# Altium PCB Arm_V1.PcbDoc
Units mil, origin at the board's own origin, x right, y up, seen from the top; angles counter-clockwise.
Board outline 2870 x 2610 mil, 4 copper layers (Top Layer, Ground, Power, Bottom Layer), stack 58.661 mil thick; 196 components, 122 nets, 577 pads, 0 vias.
Unrouted connection lines stored in the file: 396.
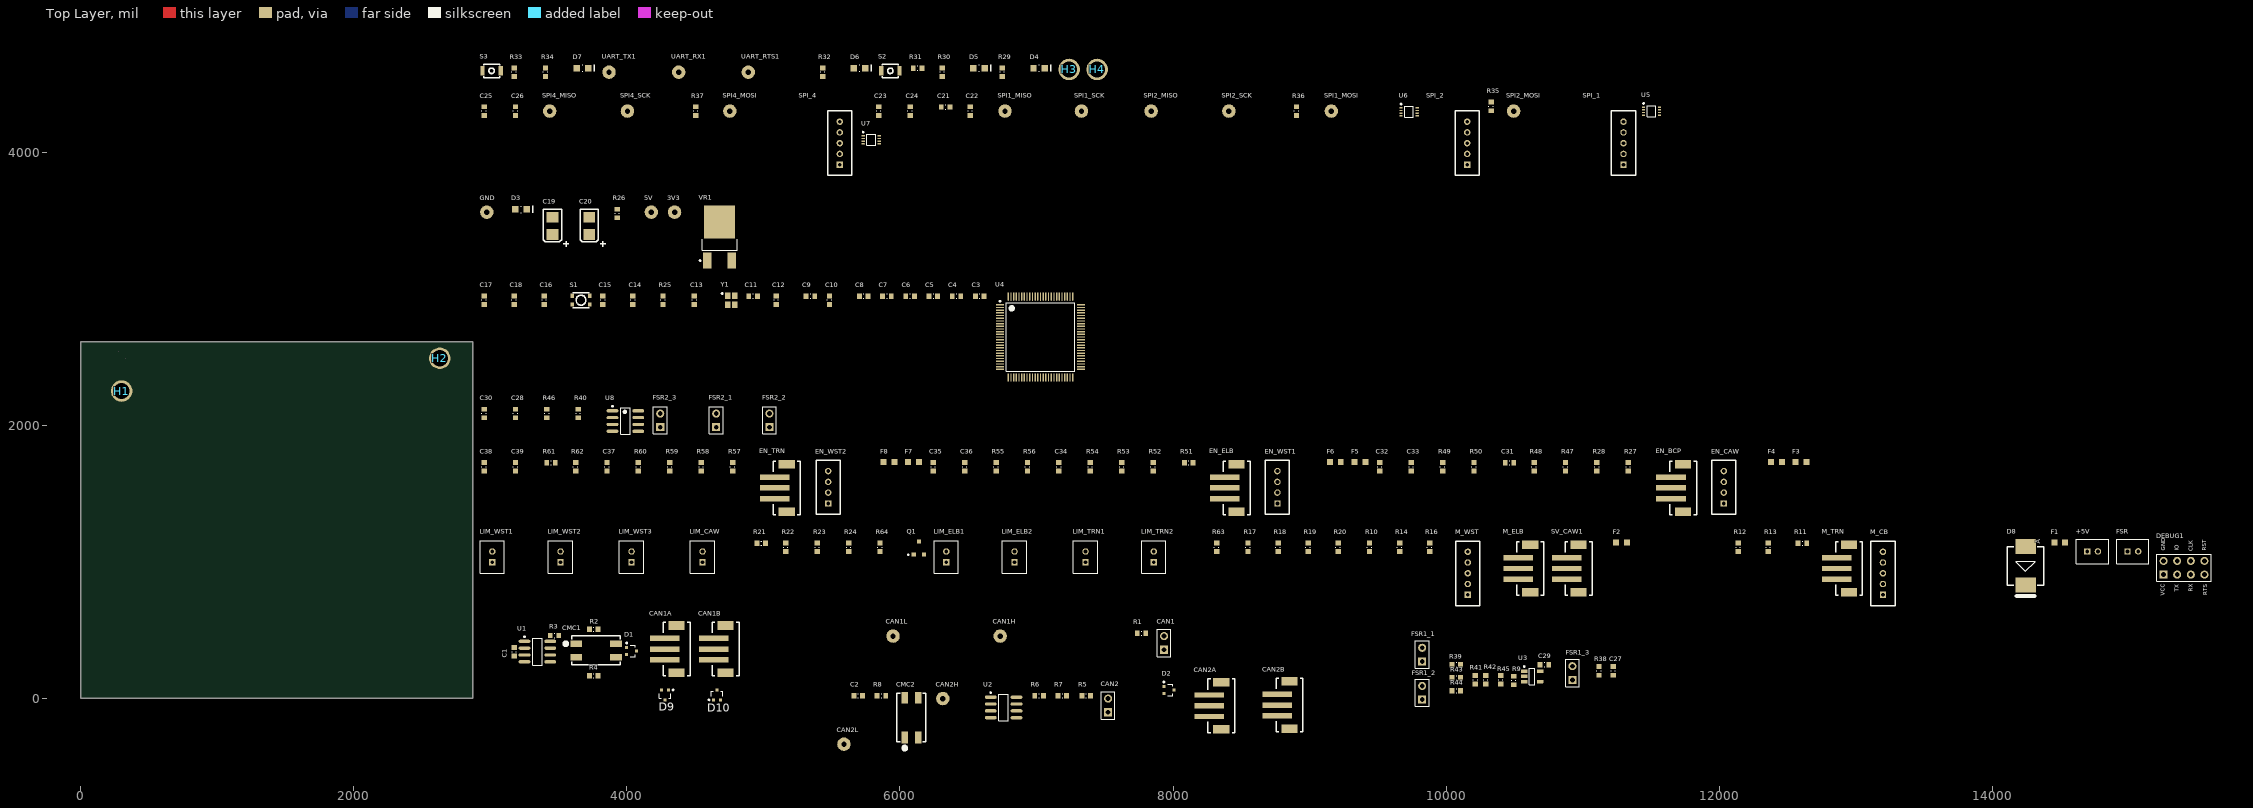
[diagram p0: Top Layer view]
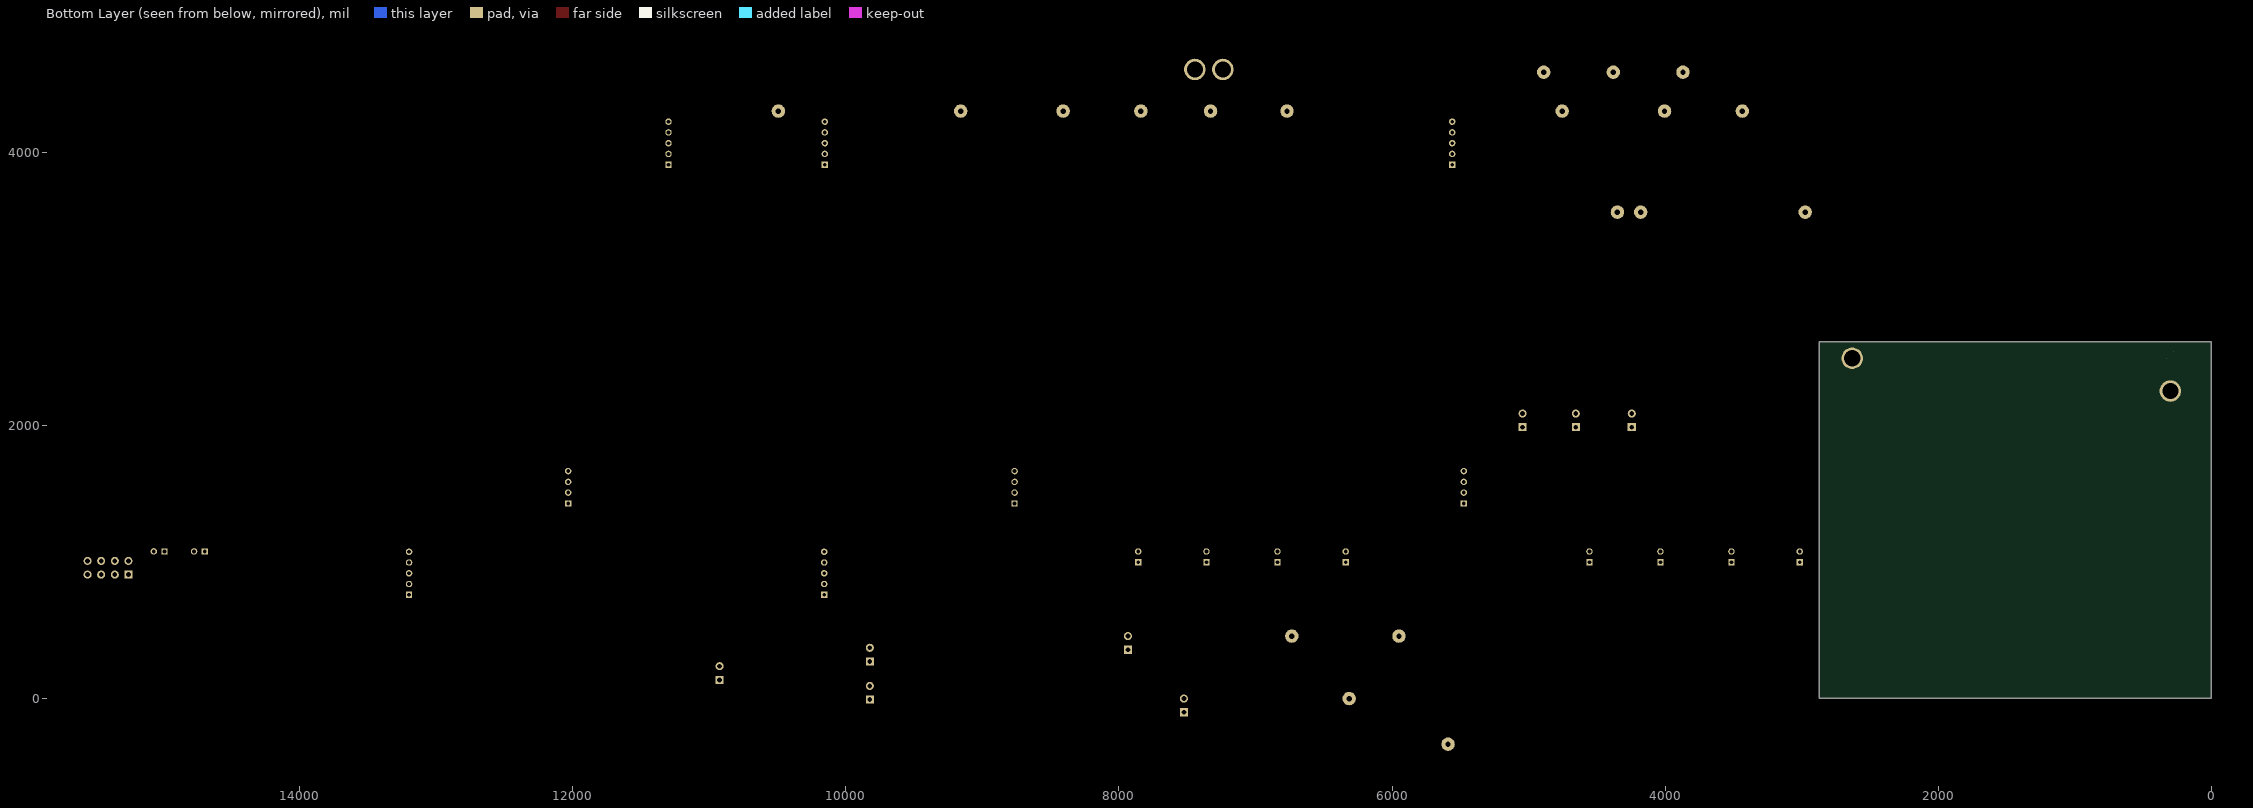
[diagram p1: Bottom Layer view, seen from below]
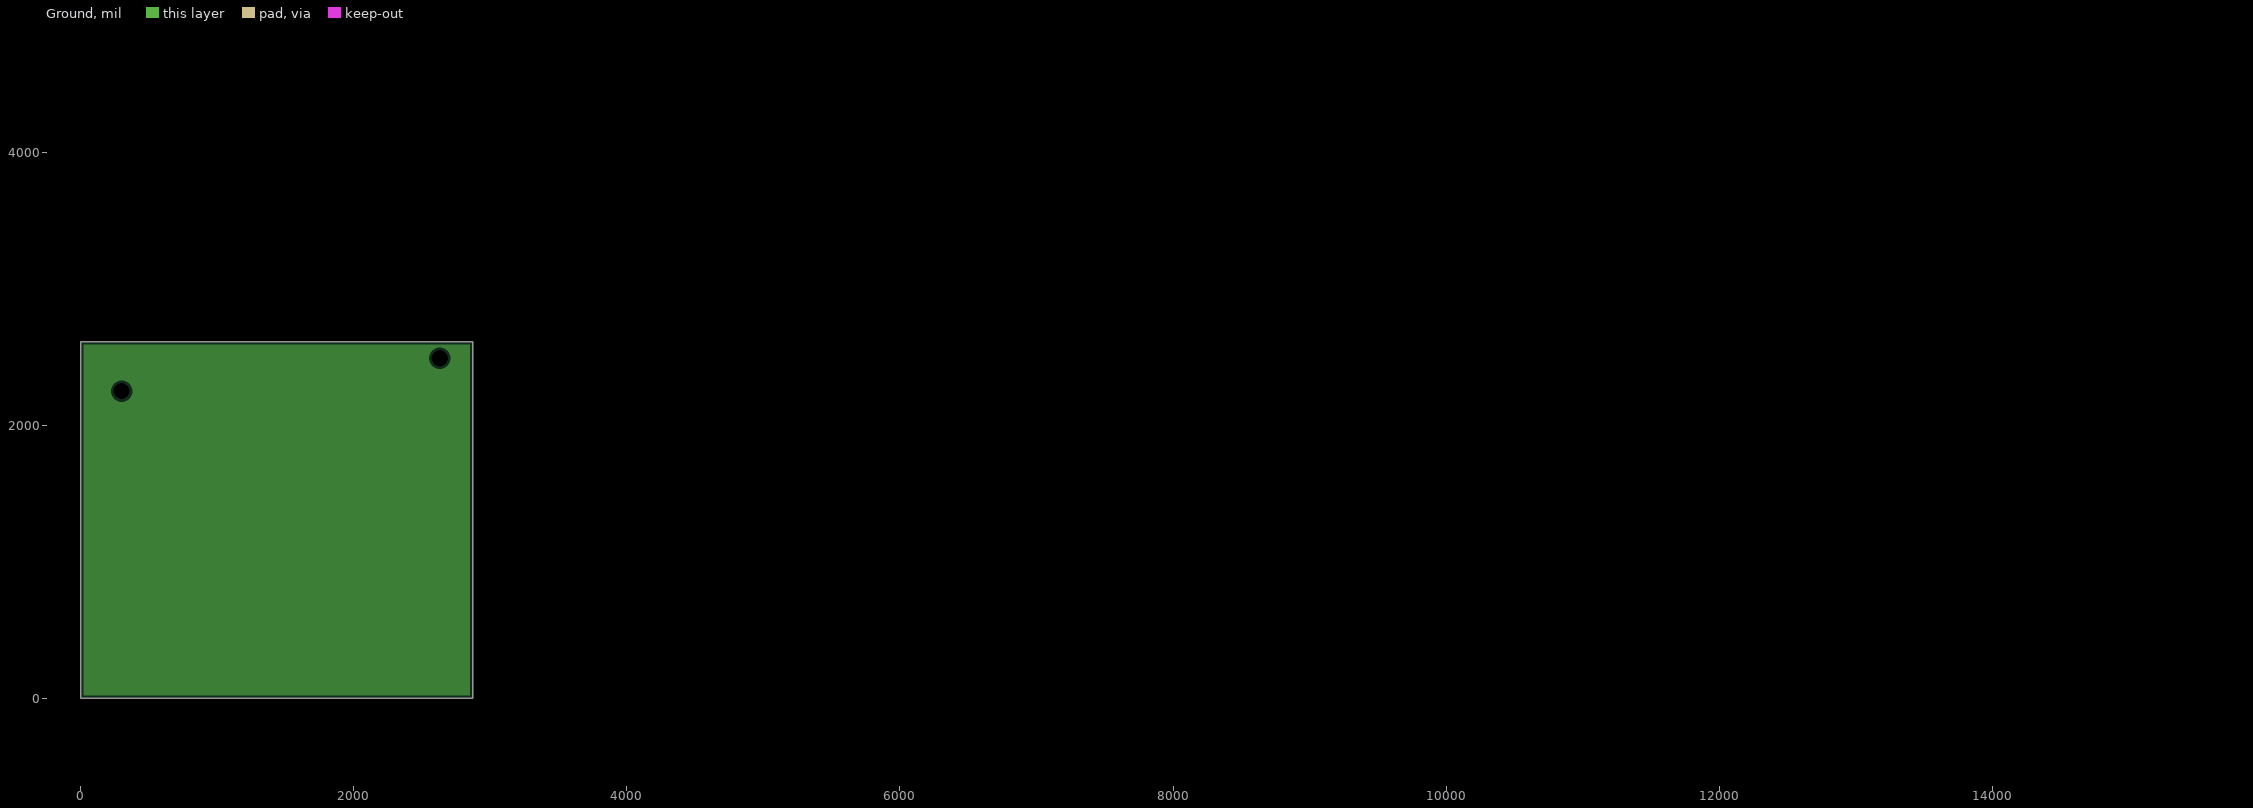
[diagram p2: Ground, clearances drawn from the general rule]
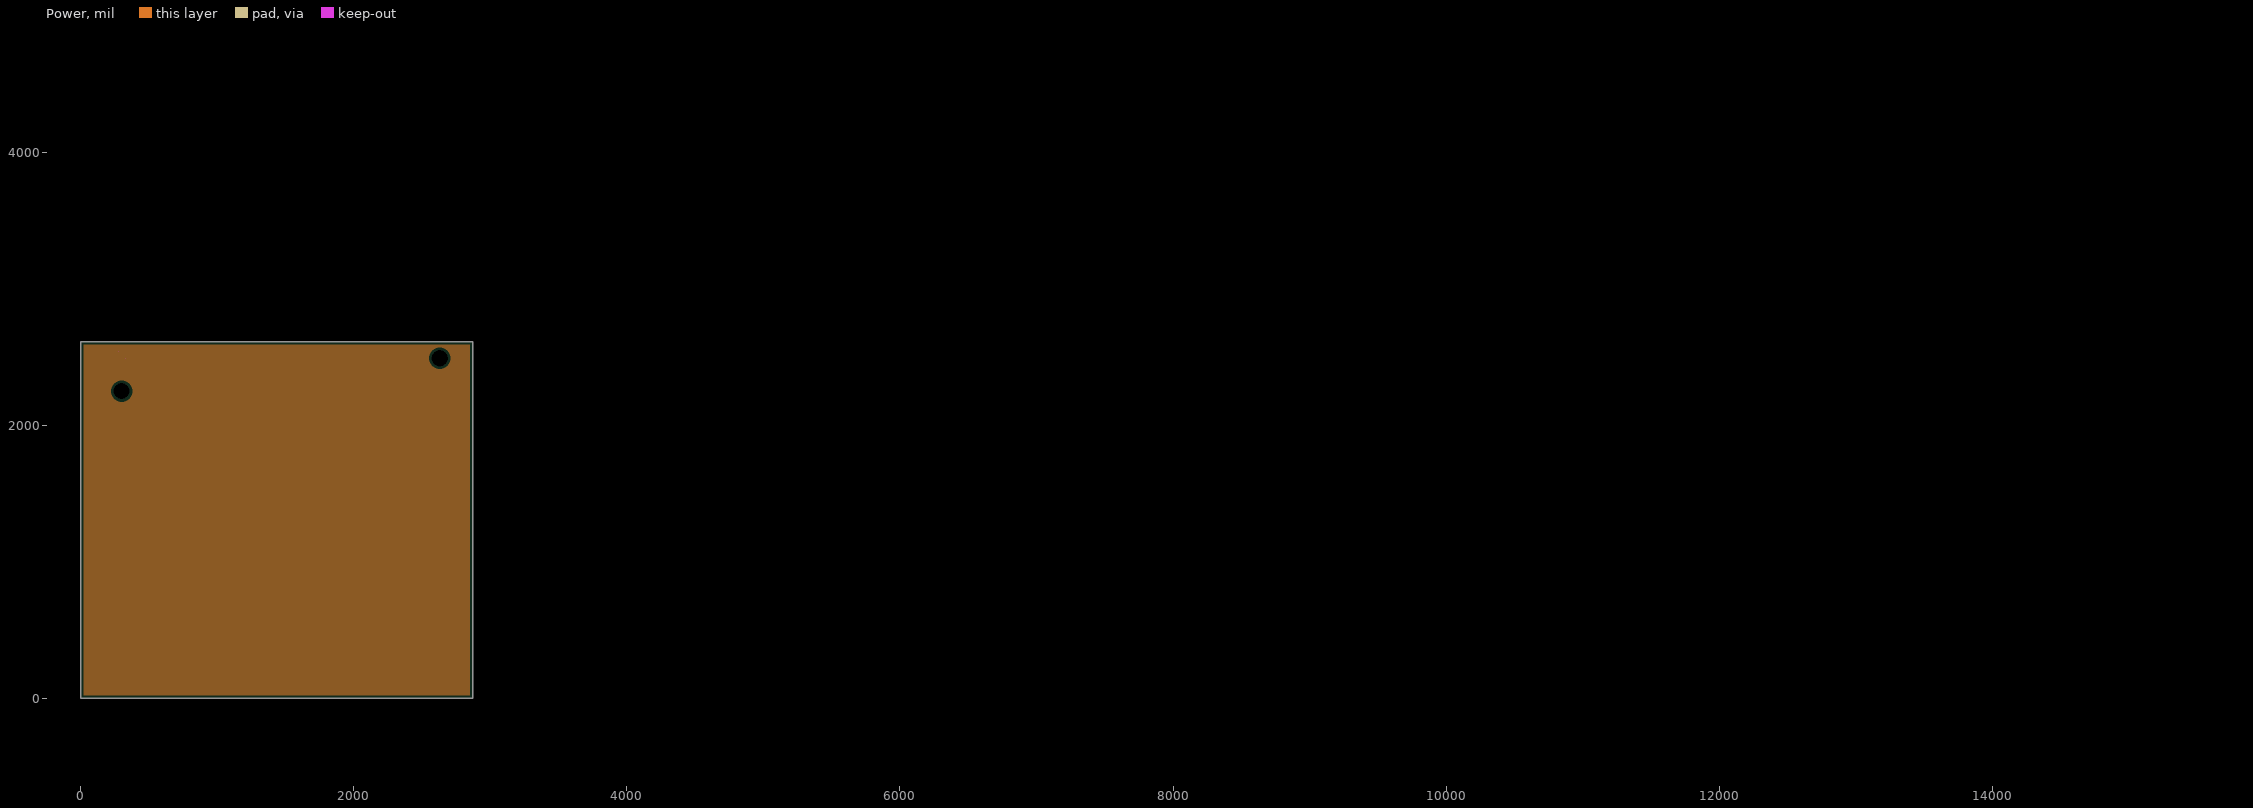
[diagram p3: Power, clearances drawn from the general rule]

## Layer stack, top to bottom
Top Solder: solder mask 0.8, Solder Resist, Dk 3.5
Top Layer: signal copper 1.3778
Dielectric 2: prepreg 4.3307, PP-006, Dk 4.1
Ground: plane copper 1.3778
Dielectric 1: dielectric 44.4882, FR-4, Dk 4.8
Power: plane copper 1.3778
Dielectric 3: prepreg 4.3307, PP-006, Dk 4.1
Bottom Layer: signal copper 1.3778
Bottom Solder: solder mask 0.8, Solder Resist, Dk 3.5

## Board outline
0,0 2870,0 2870,2610 0,2610
cut-out: 330,2485
cut-out: 275,2540

## Design rules (kind name [scope] priority, off if disabled: settings)
BoardOutlineClearance [All] p1: gap=10 ignorepadtopadclearanceinfootprint=FALSE except(0: Arc-SplitContinuation Track-SplitContinuation SMDPad-SplitContinuation THPad-SplitContinuation Via-SplitContinuation Fill-SplitContinuation Poly-SplitContinuation Region-SplitContinuation Text-SplitContinuation)
Clearance [All] p1: gap=10 ignorepadtopadclearanceinfootprint=TRUE except(0: Arc-Hole Track-Hole SMDPad-Hole THPad-Hole Via-Hole Fill-Hole Poly-Hole Region-Hole Text-Hole; 6: Arc-Arc Arc-Track Arc-SMDPad Track-Track Track-SMDPad SMDPad-SMDPad)
DiffPairsRouting [All] p1: maxlimit=10 minlimit=10 mostfreqgap=10 toplayer_minwidth=15 toplayer_maxwidth=15 toplayer_prefwidth=15 bottomlayer_minwidth=15 bottomlayer_maxwidth=15 bottomlayer_prefwidth=15 maxuncoupledlength=500
HoleSize [All] p1: absolutevalues=TRUE maxlimit=244.09 minlimit=7.87 maxpercent=80.000 minpercent=20.000
MinimumAnnularRing [All] p1: minimumring=5.91
PlaneClearance [All] p1: clearance=20
PlaneConnect [All] p1: planeconnectstyle=Relief reliefexpansion=20 reliefentries=4 reliefconductorwidth=10 reliefairgap=10
PolygonConnect [All] p1: connectstyle=Direct reliefconductorwidth=10 reliefentries=4 polygonreliefangle="90 Angle" airgapwidth=10
RoutingVias [All] p1: holewidth=16 width=28 viastyle="Through Hole" minholewidth=16 minwidth=28 maxholewidth=28 maxwidth=50
SolderMaskExpansion [All] p1: expansion=4
Width thicc [(InNet('-5V') OR InNet('+3V3') OR InNet('+5V'))] p1: maxlimit=20 minlimit=10 preferedwidth=15 minimp=50.000000 maximp=50.000000 favimp=50.000000
Width [All] p2: maxlimit=20 minlimit=4 preferedwidth=10 bottomlayer_minwidth=6 minimp=50.000000 maximp=50.000000 favimp=50.000000
26 further rules are at their usual default settings.

## Classes and differential pairs
component class "SPI Encoders": C21 C22 C23 C24 C25 C26 R35 R36 R37 SPI1_MISO SPI1_MOSI SPI1_SCK SPI2_MISO SPI2_MOSI SPI2_SCK SPI4_MISO SPI4_MOSI SPI4_SCK SPI_1 SPI_2 SPI_4 U5 U6 U7
component class Encoders: C31 C32 C33 C34 C35 C36 C37 C38 C39 EN_BCP EN_CAW EN_ELB EN_TRN EN_WST1 EN_WST2 F3 F4 F5 F6 F7 F8 R27 R28 R47 R48 R49 R50 R51 R52 R53 R54 R55 R56 R57 R58 R59 R60 R61 R62
component class Connectors: +5V CAN1A CAN1B CAN2A CAN2B D1 D2 D8 D9 D10 DEBUG1 F1 F2 FSR LIM_CAW LIM_ELB1 LIM_ELB2 LIM_TRN1 LIM_TRN2 LIM_WST1 LIM_WST2 LIM_WST3 M_CB M_ELB M_TRN M_WST Q1 R10 R11 R12 R13 R14 R16 R17 R18 R19 R20 R21 R22 R23 R24 R63 R64 SV_CAW1
component class FSR: C27 C28 C29 C30 FSR1_1 FSR1_2 FSR1_3 FSR2_1 FSR2_2 FSR2_3 R9 R38 R39 R40 R41 R42 R43 R44 R45 R46 U3 U8
component class Support: D4 D5 D6 D7 H1 H2 H3 H4 R29 R30 R31 R32 R33 R34 S2 S3 UART_RTS UART_RTS1 UART_RX UART_RX1 UART_TX UART_TX1
component class Power: 3V3 5V C19 C20 D3 GND R26 VR1
component class MCU: C3 C4 C5 C6 C7 C8 C9 C10 C11 C12 C13 C14 C15 C16 C17 C18 R25 S1 U4 Y1
component class CAN: C1 C2 CAN1 CAN1H CAN1L CAN2 CAN2H CAN2L CMC1 CMC2 R1 R2 R3 R4 R5 R6 R7 R8 U1 U2
differential pair CAN2: +CAN2_P -CAN2_N
differential pair CAN1: +CAN1_P -CAN1_N

## Components (designator, comment, footprint, x,y, rotation, side; value= is the part's Value field where it differs from the comment)
3V3 "TESTPOINT_LOOP" TESTPOINT_LOOP 4349.5,3560.5 r0 top
5V "TESTPOINT_LOOP" TESTPOINT_LOOP 4179.5,3560.5 r0 top
+5V "CON_2M" JST-B2B-PHSK 14734.5,1075.5 r0 top
C1 "CAP_0.1uF_50V_0603" CAPC0603(1608)55_N 3175,340 r270 top value=0.1uF
C2 "CAP_0.1uF_50V_0603" CAPC0603(1608)55_N 5694.5,17.78 r0 top value=0.1uF
C3 "CAP_4.7uF_0603" CAPC0603(1608)55_N 6584.5,2945.5 r0 top value=4.7uF
C4 "CAP_0.1uF_16V_0603" CAPC0603(1608)55_N 6414.5,2945.5 r0 top value=0.1uF
C5 "CAP_0.1uF_16V_0603" CAPC0603(1608)55_N 6244.5,2945.5 r0 top value=0.1uF
C6 "CAP_0.1uF_16V_0603" CAPC0603(1608)55_N 6074.5,2945.5 r0 top value=0.1uF
C7 "CAP_0.1uF_16V_0603" CAPC0603(1608)55_N 5904.5,2945.5 r0 top value=0.1uF
C8 "CAP_0.1uF_16V_0603" CAPC0603(1608)55_N 5734.5,2945.5 r0 top value=0.1uF
C9 "CAP_1uF_16V_0603" CAPC0603(1608)55_N 5344.5,2945.5 r0 top value=1uF
C10 "CAP_1uF_16V_0603" CAPC0603(1608)55_N 5484.5,2915.5 r90 top value=1uF
C11 "CAP_0.1uF_50V_0603" CAPC0603(1608)55_N 4924.5,2945.5 r0 top value=0.1uF
C12 "CAP_10nF_0603" CAPC0603(1608)55_N 5094.5,2915.5 r90 top value=10nF
C13 "CAP_0.1uF_16V_0603" CAPC0603(1608)55_N 4494.5,2915.5 r90 top value=0.1uF
C14 "CAP_15pF_0603" CAPC0603(1608)55_N 4044.5,2915.5 r90 top value=15pF
C15 "CAP_15pF_0603" CAPC0603(1608)55_N 3824.5,2915.5 r90 top value=15pF
C16 "CAP_0.1uF_16V_0603" CAPC0603(1608)55_N 3394.5,2915.5 r90 top value=0.1uF
C17 "CAP_4.7uF_0603" CAPC0603(1608)55_N 2954.5,2915.5 r90 top value=4.7uF
C18 "CAP_4.7uF_0603" CAPC0603(1608)55_N 3174.5,2915.5 r90 top value=4.7uF
C19 "CAP_10uF_1411_POL" AVX-CAPC3528_V 3454.5,3460.5 r90 top value=10uF
C20 "CAP_10uF_1411_POL" AVX-CAPC3528_V 3724.5,3460.5 r90 top value=10uF
C21 "CAP_0.1uF_16V_0603" CAPC0603(1608)55_N 6334.5,4330.5 r0 top value=0.1uF
C22 "CAP_0.1uF_16V_0603" CAPC0603(1608)55_N 6514.5,4300.5 r90 top value=0.1uF
C23 "CAP_0.1uF_16V_0603" CAPC0603(1608)55_N 5844.5,4300.5 r90 top value=0.1uF
C24 "CAP_0.1uF_16V_0603" CAPC0603(1608)55_N 6074.5,4300.5 r90 top value=0.1uF
C25 "CAP_0.1uF_16V_0603" CAPC0603(1608)55_N 2954.5,4300.5 r90 top value=0.1uF
C26 "CAP_0.1uF_16V_0603" CAPC0603(1608)55_N 3184.5,4300.5 r90 top value=0.1uF
C27 "CAP_DNP_0603" CAPC0603(1608)55_N 11225,200 r90 top value=DNP
C28 "CAP_DNP_0603" CAPC0603(1608)55_N 3184.5,2085.5 r90 top value=DNP
C29 "CAP_0.1uF_16V_0603" CAPC0603(1608)55_N 10720,246.5 r0 top value=0.1uF
C30 "CAP_0.1uF_16V_0603" CAPC0603(1608)55_N 2954.5,2085.5 r90 top value=0.1uF
C31 "CAP_0.1uF_16V_0603" CAPC0603(1608)55_N 10464.5,1725.5 r0 top value=0.1uF
C32 "CAP_0.1uF_16V_0603" CAPC0603(1608)55_N 9514.5,1695.5 r90 top value=0.1uF
C33 "CAP_0.1uF_16V_0603" CAPC0603(1608)55_N 9744.5,1695.5 r90 top value=0.1uF
C34 "CAP_0.1uF_16V_0603" CAPC0603(1608)55_N 7164.5,1695.5 r90 top value=0.1uF
C35 "CAP_0.1uF_16V_0603" CAPC0603(1608)55_N 6244.5,1695.5 r90 top value=0.1uF
C36 "CAP_0.1uF_16V_0603" CAPC0603(1608)55_N 6474.5,1695.5 r90 top value=0.1uF
C37 "CAP_0.1uF_16V_0603" CAPC0603(1608)55_N 3854.5,1695.5 r90 top value=0.1uF
C38 "CAP_0.1uF_16V_0603" CAPC0603(1608)55_N 2954.5,1695.5 r90 top value=0.1uF
C39 "CAP_0.1uF_16V_0603" CAPC0603(1608)55_N 3184.5,1695.5 r90 top value=0.1uF
CAN1 "CAN1JMP" HDR1X2 7934.5,355.5 r90 top
CAN1A "CON_3M" JST-B3B-SM4-TB 4463.43,360 r90 top
CAN1B "CON_3M" JST-B3B-SM4-TB 4822.01,360 r90 top
CAN1H "TESTPOINT_LOOP" TESTPOINT_LOOP 6734.5,455.5 r90 top
CAN1L "TESTPOINT_LOOP" TESTPOINT_LOOP 5949.5,455.5 r90 top
CAN2 "CAN2JMP" HDR1X2 7524.5,-102.22 r90 top
CAN2A "CON_3M" JST-B3B-SM4-TB 8452.01,-55 r90 top
CAN2B "CON_3M" JST-B3B-SM4-TB 8952.01,-50 r90 top
CAN2H "TESTPOINT_LOOP" TESTPOINT_LOOP 6314.5,-2.22 r90 top
CAN2L "TESTPOINT_LOOP" TESTPOINT_LOOP 5590,-336.29 r90 top
CMC1 "CMC" DR331-513AE 3775,350 r0 top
CMC2 "CMC" DR331-513AE 6084.5,-142.22 r90 top
D1 "TVS_DIODE_CAN" NXP-SOT323-3 4034.5,346.26 r0 top
D2 "TVS_DIODE_CAN" NXP-SOT323-3 7970,60 r0 top
D3 "DIO_LED_G" LED_0805_LINE 3224.5,3580.5 r0 top
D4 "DIO_LED_Y" LED_0805_LINE 7019.5,4615.5 r0 top
D5 "DIO_LED_G" LED_0805_LINE 6579.5,4615.5 r0 top
D6 "DIO_LED_G" LED_0805_LINE 5704.5,4615.5 r0 top
D7 "DIO_LED_G" LED_0805_LINE 3674.5,4615.5 r0 top
D8 "SS32" SS32 14244.5,970.5 r90 top
D9 "TVS_DIODE_CAN" NXP-SOT323-3 4280,25 r270 top
D10 "TVS_DIODE_CAN" NXP-SOT323-3 4660,25 r90 top
DEBUG1 "HEADER 4X2" HEADER_2X4 15254.5,905.5 r0 top
EN_BCP "CON_3M" JST-B3B-SM4-TB 11834.5,1540.5 r90 top
EN_CAW "CON_4M" JST-B4B-PHSK 12034.5,1545.5 r90 top
EN_ELB "CON_3M" JST-B3B-SM4-TB 8564.5,1540.5 r90 top
EN_TRN "CON_3M" JST-B3B-SM4-TB 5269.5,1540.5 r90 top
EN_WST1 "CON_4M" JST-B4B-PHSK 8764.5,1545.5 r90 top
EN_WST2 "CON_4M" JST-B4B-PHSK 5474.5,1545.5 r90 top
F1 "FUSE_2A_0603" FUSE_0603 14494.5,1140.5 r0 top
F2 "FUSE_1.5A_0603" FUSE_0603 11284.5,1140.5 r0 top
F3 "FUSE_250mA_0603" FUSE_0603 12599.5,1730.5 r0 top
F4 "FUSE_250mA_0603" FUSE_0603 12419.5,1730.5 r0 top
F5 "FUSE_250mA_0603" FUSE_0603 9369.5,1730.5 r0 top
F6 "FUSE_250mA_0603" FUSE_0603 9189.5,1730.5 r0 top
F7 "FUSE_250mA_0603" FUSE_0603 6099.5,1730.5 r0 top
F8 "FUSE_250mA_0603" FUSE_0603 5919.5,1730.5 r0 top
FSR "CON_2M" JST-B2B-PHSK 15029.5,1075.5 r0 top
FSR1_1 "FSR Header" HDR1X2 9825,270 r90 top
FSR1_2 "FSR Jumper" HDR1X2 9825,-10 r90 top
FSR1_3 "FSR Header" HDR1X2 10925,135 r90 top
FSR2_1 "FSR Header" HDR1X2 4654.5,1985.5 r90 top
FSR2_2 "FSR Header" HDR1X2 5044.5,1985.5 r90 top
FSR2_3 "FSR Header" HDR1X2 4244.5,1985.5 r90 top
GND "TESTPOINT_LOOP" TESTPOINT_LOOP 2974.5,3560.5 r0 top
H1 "MOUNTING_HOLES" MOUNTING_HOLE 300,2250 r0 top
H2 "MOUNTING_HOLES" MOUNTING_HOLE 2630,2490 r0 top
H3 "MOUNTING_HOLES" MOUNTING_HOLE 7239.5,4605.5 r0 top
H4 "MOUNTING_HOLES" MOUNTING_HOLE 7444.5,4605.5 r0 top
LIM_CAW "CON_2M" JST-B2B-PHSK 4554.5,1035.5 r90 top
LIM_ELB1 "CON_2M" JST-B2B-PHSK 6339.5,1035.5 r90 top
LIM_ELB2 "CON_2M" JST-B2B-PHSK 6839.5,1035.5 r90 top
LIM_TRN1 "CON_2M" JST-B2B-PHSK 7359.5,1035.5 r90 top
LIM_TRN2 "CON_2M" JST-B2B-PHSK 7859.5,1035.5 r90 top
LIM_WST1 "CON_2M" JST-B2B-PHSK 3014.5,1035.5 r90 top
LIM_WST2 "CON_2M" JST-B2B-PHSK 3514.5,1035.5 r90 top
LIM_WST3 "CON_2M" JST-B2B-PHSK 4034.5,1035.5 r90 top
M_CB "CON_5M" JST-B5B-PHSK 13199.5,915.5 r90 top
M_ELB "CON_3M" JST-B3B-SM4-TB 10714.5,950.5 r90 top
M_TRN "CON_3M" JST-B3B-SM4-TB 13049.5,950.5 r90 top
M_WST "CON_5M" JST-B5B-PHSK 10159.5,915.5 r90 top
Q1 "NMOS_20V_6A" NMOS_SOT23-3 6139.5,1100.5 r0 top
R1 "RES_120R_0603" RESC0603(1608)_N 7769.5,475.5 r0 top value=120R
R2 "RES_0R_0603" RESC0603(1608)_N 3757.15,505 r0 top value=0R
R3 "RES_0R_0603" RESC0603(1608)_N 3470,460 r0 top value=0R
R4 "RES_0R_0603" RESC0603(1608)_N 3757.15,165 r0 top value=0R
R5 "RES_120R_0603" RESC0603(1608)_N 7364.5,17.78 r0 top value=120R
R6 "RES_0R_0603" RESC0603(1608)_N 7019.5,17.78 r0 top value=0R
R7 "RES_0R_0603" RESC0603(1608)_N 7189.5,17.78 r0 top value=0R
R8 "RES_0R_0603" RESC0603(1608)_N 5864.5,17.78 r0 top value=0R
R9 "RES_825K_0603" RESC0603(1608)_N 10495,130 r270 top value=825K
R10 "RES_10K_0603" RESC0603(1608)_N 9439.5,1105.5 r90 top value=10K
R11 "RES_10K_0603" RESC0603(1608)_N 12609.5,1135.5 r0 top value=10K
R12 "RES_10K_0603" RESC0603(1608)_N 12139.5,1105.5 r90 top value=10K
R13 "RES_10K_0603" RESC0603(1608)_N 12359.5,1105.5 r90 top value=10K
R14 "RES_10K_0603" RESC0603(1608)_N 9659.5,1105.5 r90 top value=10K
R16 "RES_10K_0603" RESC0603(1608)_N 9879.5,1105.5 r90 top value=10K
R17 "RES_10K_0603" RESC0603(1608)_N 8549.5,1105.5 r90 top value=10K
R18 "RES_10K_0603" RESC0603(1608)_N 8769.5,1105.5 r90 top value=10K
R19 "RES_10K_0603" RESC0603(1608)_N 8989.5,1105.5 r90 top value=10K
R20 "RES_10K_0603" RESC0603(1608)_N 9209.5,1105.5 r90 top value=10K
R21 "RES_10K_0603" RESC0603(1608)_N 4984.5,1135.5 r0 top value=10K
R22 "RES_10K_0603" RESC0603(1608)_N 5164.5,1105.5 r90 top value=10K
R23 "RES_10K_0603" RESC0603(1608)_N 5394.5,1105.5 r90 top value=10K
R24 "RES_10K_0603" RESC0603(1608)_N 5624.5,1105.5 r90 top value=10K
R25 "RES_0R_0603" RESC0603(1608)_N 4264.5,2915.5 r90 top value=0R
R26 "RES_100R_0603" RESC0603(1608)_N 3929.5,3550.5 r90 top value=100R
R27 "RES_3K3_0603" RESC0603(1608)_N 11334.5,1695.5 r90 top value=3K3
R28 "RES_3K3_0603" RESC0603(1608)_N 11104.5,1695.5 r90 top value=3K3
R29 "RES_100R_0603" RESC0603(1608)_N 6749.5,4585.5 r90 top value=100R
R30 "RES_100R_0603" RESC0603(1608)_N 6309.5,4585.5 r90 top value=100R
R31 "RES_10K_0603" RESC0603(1608)_N 6129.5,4615.5 r0 top value=10K
R32 "RES_100R_0603" RESC0603(1608)_N 5434.5,4585.5 r90 top value=100R
R33 "RES_100R_0603" RESC0603(1608)_N 3174.5,4585.5 r90 top value=100R
R34 "RES_10K_0603" RESC0603(1608)_N 3404.5,4585.5 r90 top value=10K
R35 "RES_1K_0603" RESC0603(1608)_N 10330,4335 r90 top value=1K
R36 "RES_1K_0603" RESC0603(1608)_N 8904.5,4300.5 r90 top value=1K
R37 "RES_1K_0603" RESC0603(1608)_N 4504.5,4300.5 r90 top value=1K
R38 "RES_DNP_0603" RESC0603(1608)_N 11120,200 r90 top value=DNP
R39 "1.1K 1%" RESC0603(1608)_N 10075,246.5 r0 top value=1K1
R40 "RES_DNP_0603" RESC0603(1608)_N 3644.5,2085.5 r90 top value=DNP
R41 "RES_165K_0603" RESC0603(1608)_N 10215,135 r270 top value=165K
R42 "RES_165K_0603" RESC0603(1608)_N 10290,135 r90 top value=165K
R43 "RES_2K2_0603" RESC0603(1608)_N 10075,150 r0 top value=2K2
R44 "14.3K 1%" RESC0603(1608)_N 10075,55 r0 top value=14K3
R45 "RES_825K_0603" RESC0603(1608)_N 10400,135 r270 top value=825K
R46 "RES_1K_0603" RESC0603(1608)_N 3414.5,2085.5 r90 top value=1K
R47 "RES_3K3_0603" RESC0603(1608)_N 10874.5,1695.5 r90 top value=3K3
R48 "RES_2K2_0603" RESC0603(1608)_N 10644.5,1695.5 r90 top value=2K2
R49 "RES_2K2_0603" RESC0603(1608)_N 9974.5,1695.5 r90 top value=2K2
R50 "RES_2K2_0603" RESC0603(1608)_N 10204.5,1695.5 r90 top value=2K2
R51 "RES_3K3_0603" RESC0603(1608)_N 8114.5,1725.5 r0 top value=3K3
R52 "RES_3K3_0603" RESC0603(1608)_N 7854.5,1695.5 r90 top value=3K3
R53 "RES_3K3_0603" RESC0603(1608)_N 7624.5,1695.5 r90 top value=3K3
R54 "RES_2K2_0603" RESC0603(1608)_N 7394.5,1695.5 r90 top value=2K2
R55 "RES_2K2_0603" RESC0603(1608)_N 6704.5,1695.5 r90 top value=2K2
R56 "RES_2K2_0603" RESC0603(1608)_N 6934.5,1695.5 r90 top value=2K2
R57 "RES_3K3_0603" RESC0603(1608)_N 4774.5,1695.5 r90 top value=3K3
R58 "RES_3K3_0603" RESC0603(1608)_N 4544.5,1695.5 r90 top value=3K3
R59 "RES_3K3_0603" RESC0603(1608)_N 4314.5,1695.5 r90 top value=3K3
R60 "RES_2K2_0603" RESC0603(1608)_N 4084.5,1695.5 r90 top value=2K2
R61 "RES_2K2_0603" RESC0603(1608)_N 3444.5,1725.5 r0 top value=2K2
R62 "RES_2K2_0603" RESC0603(1608)_N 3624.5,1695.5 r90 top value=2K2
R63 "RES_10K_0603" RESC0603(1608)_N 8319.5,1105.5 r90 top value=10K
R64 "RES_10K_0603" RESC0603(1608)_N 5854.5,1105.5 r90 top value=10K
S1 "SW_PWR" PTS830GM140 3664.5,2915.5 r0 top
S2 "SW_TACTILE" B3U-1100P 5929.5,4595.5 r0 top
S3 "SW_TACTILE" B3U-1100P 3009.5,4595.5 r0 top
SPI1_MISO "TESTPOINT_LOOP" TESTPOINT_LOOP 6769.5,4300.5 r90 top
SPI1_MOSI "TESTPOINT_LOOP" TESTPOINT_LOOP 9159.5,4300.5 r90 top
SPI1_SCK "TESTPOINT_LOOP" TESTPOINT_LOOP 7329.5,4300.5 r90 top
SPI2_MISO "TESTPOINT_LOOP" TESTPOINT_LOOP 7839.5,4300.5 r90 top
SPI2_MOSI "TESTPOINT_LOOP" TESTPOINT_LOOP 10494.5,4300.5 r90 top
SPI2_SCK "TESTPOINT_LOOP" TESTPOINT_LOOP 8409.5,4300.5 r90 top
SPI4_MISO "TESTPOINT_LOOP" TESTPOINT_LOOP 3434.5,4300.5 r90 top
SPI4_MOSI "TESTPOINT_LOOP" TESTPOINT_LOOP 4754.5,4300.5 r90 top
SPI4_SCK "TESTPOINT_LOOP" TESTPOINT_LOOP 4004.5,4300.5 r90 top
SPI_1 "CON_5M" JST-B5B-PHSK 11299.5,4065.5 r90 top
SPI_2 "CON_5M" JST-B5B-PHSK 10154.5,4065.5 r90 top
SPI_4 "CON_5M" JST-B5B-PHSK 5559.5,4065.5 r90 top
SV_CAW1 "CON_3M" JST-B3B-SM4-TB 11069.5,950.5 r90 top
U1 "IC TXRX CAN" LT-S8_N 3345,342.03 r0 top
U2 "IC TXRX CAN" LT-S8_N 6759.5,-67.22 r0 top
U3 "OPA313IDBVR" DBV0005A_M 10630.43,160 r0 top
U4 "STM32F446VET7" STM-LQFP100_L 7029.5,2645.5 r0 top
U5 "SN74LVC2T45DCURG4" DCU0008A_L 11505,4300 r0 top
U6 "SN74LVC2T45DCURG4" DCU0008A_L 9729.5,4295.5 r0 top
U7 "SN74LVC2T45DCURG4" DCU0008A_L 5790,4090 r0 top
U8 "CA3140AMZ" CA3140AMZ 3989.5,2030.5 r0 top
UART_RTS1 "TESTPOINT_LOOP" TESTPOINT_LOOP 4889.5,4585.5 r90 top
UART_RX1 "TESTPOINT_LOOP" TESTPOINT_LOOP 4379.5,4585.5 r90 top
UART_TX1 "TESTPOINT_LOOP" TESTPOINT_LOOP 3869.5,4585.5 r90 top
VR1 "5V0_3V3_LDO" VOLTAGE_REGULATOR 4679.5,3315.5 r0 top
Y1 "CRYSTAL_32MHZ" AVX-CX2520DB32000D0GEJZ1-4_V 4764.5,2915.5 r0 top

## Footprints (in the part's own frame and the unit in brackets; to place one, negate y for a bottom-side part, rotate by r counter-clockwise, add the part's x,y. Pads: shape width x height; smd on the part's side, far side on the other; paste and mask are expansions set on the pad)
AVX-CAPC3528_V [mm] "SMT Capacitor, 2 Leads, Body 3.5x2.8mm"
  rect 2x2.2 smd: 1(-1.6,0) 2(1.6,0)
  silkscreen extent -3.87,-3.05 3.05,1.7, body extent -1.79,-1.54 1.8,1.54, height 1.9
AVX-CX2520DB32000D0GEJZ1-4_V [mm] "Hand Drawn, 4-Leads,Body 2.5x2mm"
  rect 1x1.2 smd: 1(-0.65,0.85) 2(-0.65,-0.85) 3(0.65,-0.85) 4(0.65,0.85)
  silkscreen extent -1.82,1.13 -1.58,1.38, body extent -1,-1.25 1,1.25, height 0.55
B3U-1100P [mm] "TACTILE SWITCH GREY"
  rect 0.8x1.7 smd: 1(-1.7,0) 2(1.7,0)
  silkscreen extent -1.5,-1.25 1.5,1.25
CA3140AMZ [mm]
  oval 2.2x0.6 smd: 1(-2.4,1.905) 2(-2.4,0.635) 3(-2.4,-0.635) 4(-2.4,-1.905) 5(2.4,-1.905) 6(2.4,-0.635) 7(2.4,0.635) 8(2.4,1.905)
  silkscreen extent -2.52,-2.5 0.9,2.88, body extent -2,-2.5 2,2.5, height 1.75
CAPC0603(1608)55_N [mm] "Chip Capacitor, Body 1.6x0.8mm, Height 0.55mm, IPC Medium Density"
  rect 0.9x1 smd: 1(-0.8,0) 2(0.8,0)
  silkscreen extent -0.05,-0.4 0.05,0.4, body extent -0.87,-0.48 0.88,0.47, height 0.55
DBV0005A_M [mm] "SOT23, 5-Leads, Body 3.05x1.75mm, Pitch 0.95mm, IPC Low Density"
  rrect15% 1.2x0.65 smd: 1(-1.475,0.95) 2(-1.475,0) 3(-1.475,-0.95) 4(1.475,-0.95) 5(1.475,0.95)
  silkscreen extent -1.6,-1.55 0.5,1.95, body extent -1.42,-1.46 1.42,1.46, height 1.08
DCU0008A_L [mm] "SOP, 8-Leads, Body 2.4x2.1mm, Pitch 0.5mm, IPC High Density"
  rrect40% 0.6x0.25 smd: 1(-1.5,0.75) 2(-1.5,0.25) 3(-1.5,-0.25) 4(-1.5,-0.75) 5(1.5,-0.75) 6(1.5,-0.25) 7(1.5,0.25) 8(1.5,0.75)
  silkscreen extent -1.62,-1.05 0.8,1.55, body extent -1.56,-1 1.56,1, height 0.9
DR331-513AE [mm] "CMC"
  rect 2.2x1.2 smd: 1(-3.7,1.25) 2(-3.7,-1.25) 3(3.7,-1.25) 4(3.7,1.25)
  silkscreen extent -5.95,-2.7 4.5,2.7, body extent -4.5,-2.7 4.5,2.7, height 5.01
FUSE_0603 [mm] "Chip Fuse, Body 1.6x0.81mm"
  rect 1.09x1.09 smd: 1(-1.005,0) 2(1.005,0)
  body extent -0.8,-0.38 0.8,0.38, height 0.75
HDR1X2 [mm] "Connector; Header; 2 Position"
  rect 1.5x1.5 hole 0.9: 1(0,0)
  round 1.5 hole 0.9: 2(2.54,0)
  silkscreen extent -1.27,-1.27 3.81,1.27
HEADER_2X4 [mm]
  rect 1.5x1.5 hole 0.9: 1(0,0)
  round 1.5 hole 0.9: 2(2.54,0) 3(5.08,0) 4(7.62,0) 5(0,2.54) 6(2.54,2.54) 7(5.08,2.54) 8(7.62,2.54)
  silkscreen extent -1.27,-1.27 8.89,3.81
JST-B2B-PHSK [mm]
  rect 1.162x1.162 / inner rect 1.524x1.524 / far side rect 1.162x1.162 hole 0.7: 1(-1,0)
  round 1.2 / inner round 1.524 / far side round 1.2 hole 0.7: 2(1,0)
  silkscreen extent -3,-2.25 3,2.25, body extent -2.41,2.45 3.49,6.95, height 6
JST-B3B-SM4-TB [mm]
  rect 1x5.5 smd: 1(-2,4.75) 2(0,4.75) 3(2,4.75)
  rect 1.6x3 smd: 4(-4.4,2.5) 5(4.4,2.5)
  silkscreen extent -5,0 5,5, body extent -4.97,0 4.97,7, height 6.6
JST-B4B-PHSK [mm]
  rect 1.162x1.162 / inner rect 1.524x1.524 / far side rect 1.162x1.162 hole 0.7: 1(-3,0)
  round 1.2 / inner round 1.524 / far side round 1.2 hole 0.7: 2(-1,0) 3(1,0) 4(3,0)
  silkscreen extent -5,-2.25 5,2.25
JST-B5B-PHSK [mm]
  rect 1.162x1.162 / inner rect 1.524x1.524 / far side rect 1.162x1.162 hole 0.7: 1(-4,0)
  round 1.2 / inner round 1.524 / far side round 1.2 hole 0.7: 2(-2,0) 3(0,0) 4(2,0) 5(4,0)
  silkscreen extent -6,-2.25 6,2.25
LED_0805_LINE [mm] "SMD, 2-Leads, Body 2x1.25mm"
  rect 1.2x1.2 smd: 1(-1.05,0) 2(1.05,0)
  silkscreen extent -0.05,-0.64 2.16,0.64, body extent -1,-0.63 1,0.63, height 0.8
LT-S8_N [mm] "SOP, 8-Leads, Body 4.9x3.9mm, Pitch 1.27mm, IPC Medium Density"
  oval 2.2x0.6 smd: 1(-2.4,1.905) 2(-2.4,0.635) 3(-2.4,-0.635) 4(-2.4,-1.905) 5(2.4,-1.905) 6(2.4,-0.635) 7(2.4,0.635) 8(2.4,1.905)
  silkscreen extent -2.52,-2.5 0.9,2.88, body extent -2,-2.5 2,2.5, height 1.76
MOUNTING_HOLE [mm]
  round 4 hole 3 unplated: 0(0,0)
NMOS_SOT23-3 [mm] "SOT23, 3 pins, Body 2.90mm x 2.80mm"
  rect 0.8x0.8 smd: 1(-0.95,-1.2) 2(0.95,-1.2) 3(0,1.2)
  silkscreen extent -2.12,-1.37 -1.88,-1.13, body extent -1.46,-1.25 1.46,1.23, height 1
NXP-SOT323-3 [mm] "SOT23, 3-Leads, Body 2.2x1.35mm, Pitch 0.65mm"
  rect 0.55x0.6 smd paste-1: 1(-0.925,0.65) 2(-0.925,-0.65) 3(0.925,0)
  silkscreen extent -1.05,-1.1 0.67,1.62, body extent -1.15,-1.1 1.15,1.1, height 1.1
PTS830GM140 [mm] "PWR TACTILE SWITCH (RED)"
  rect 0.7x0.75 smd: 1(-1.625,0.825) 2(1.625,0.825) 3(-1.625,-0.825) 4(1.625,-0.825)
  silkscreen extent -1.53,-1.4 1.53,1.4, body extent -1.75,-1.3 1.75,1.3, height 1.35
RESC0603(1608)_N [mm] "Chip Resistor, Body 1.6x0.8mm, IPC Medium Density"
  rect 0.9x1 smd: 1(-0.8,0) 2(0.8,0)
  silkscreen extent -0.05,-0.4 0.05,0.4, body extent -0.85,-0.47 0.85,0.47, height 0.6
SS32 [mil] "Schottky Diode"
  rect 110x150 smd: 1(-139.96,0) 2(139.96,0)
  silkscreen extent -220,-134 140,134, body extent -148,-134 140,134, height 95
STM-LQFP100_L [mm] "Thin QFP, 100-Leads, Body 14x14mm, Pitch 0.5mm, IPC High Density"
  oval 1.55x0.25 smd: 1(-7.525,6) 2(-7.525,5.5) 3(-7.525,5) 4(-7.525,4.5) 5(-7.525,4) 6(-7.525,3.5) 7(-7.525,3) 8(-7.525,2.5) 9(-7.525,2) 10(-7.525,1.5) 11(-7.525,1) 12(-7.525,0.5) 13(-7.525,0) 14(-7.525,-0.5) 15(-7.525,-1) 16(-7.525,-1.5) 17(-7.525,-2) 18(-7.525,-2.5) 19(-7.525,-3) 20(-7.525,-3.5) 21(-7.525,-4) 22(-7.525,-4.5) 23(-7.525,-5) 24(-7.525,-5.5) 25(-7.525,-6) 51(7.525,-6) 52(7.525,-5.5) 53(7.525,-5) 54(7.525,-4.5) 55(7.525,-4) 56(7.525,-3.5) 57(7.525,-3) 58(7.525,-2.5) 59(7.525,-2) 60(7.525,-1.5) 61(7.525,-1) 62(7.525,-0.5) 63(7.525,0) 64(7.525,0.5) 65(7.525,1) 66(7.525,1.5) 67(7.525,2) 68(7.525,2.5) 69(7.525,3) 70(7.525,3.5) 71(7.525,4) 72(7.525,4.5) 73(7.525,5) 74(7.525,5.5) 75(7.525,6)
  oval 0.25x1.55 smd: 26(-6,-7.525) 27(-5.5,-7.525) 28(-5,-7.525) 29(-4.5,-7.525) 30(-4,-7.525) 31(-3.5,-7.525) 32(-3,-7.525) 33(-2.5,-7.525) 34(-2,-7.525) 35(-1.5,-7.525) 36(-1,-7.525) 37(-0.5,-7.525) 38(0,-7.525) 39(0.5,-7.525) 40(1,-7.525) 41(1.5,-7.525) 42(2,-7.525) 43(2.5,-7.525) 44(3,-7.525) 45(3.5,-7.525) 46(4,-7.525) 47(4.5,-7.525) 48(5,-7.525) 49(5.5,-7.525) 50(6,-7.525) 76(6,7.525) 77(5.5,7.525) 78(5,7.525) 79(4.5,7.525) 80(4,7.525) 81(3.5,7.525) 82(3,7.525) 83(2.5,7.525) 84(2,7.525) 85(1.5,7.525) 86(1,7.525) 87(0.5,7.525) 88(0,7.525) 89(-0.5,7.525) 90(-1,7.525) 91(-1.5,7.525) 92(-2,7.525) 93(-2.5,7.525) 94(-3,7.525) 95(-3.5,7.525) 96(-4,7.525) 97(-4.5,7.525) 98(-5,7.525) 99(-5.5,7.525) 100(-6,7.525)
  silkscreen extent -7.65,-6.35 6.35,6.8, body extent -7,-7 7,7, height 1.6
TESTPOINT_LOOP [mm]
  round 2.5 hole 1: 1(0,0)
VOLTAGE_REGULATOR [mm] "DPAK, 3-Leads, Body 6.095x6.54mm, Pitch 4.57mm"
  rect 1.6x3 smd: 1(-2.285,-2.79) 3(2.285,-2.79)
  rect 5.8x6.2 smd: 2(0,4.39)
  silkscreen extent -3.76,-2.91 3.27,1.14, body extent -3.27,-0.84 3.27,5.25, height 2.38

## Part data
3V3 5V CAN1H CAN1L CAN2H CAN2L GND SPI1_MISO SPI1_MOSI SPI1_SCK SPI2_MISO SPI2_MOSI SPI2_SCK SPI4_MISO SPI4_MOSI SPI4_SCK UART_RTS1 UART_RX1 UART_TX1: "Loop testpoint through-hole pad"
C1 C2: "CAP CER 0.1UF 50V X7R 0603", Digikey Part Number=311-1344-1-ND, Manufacturer=Yageo, MPN=CC0603KRX7R9BB104, Package="0603 (1608 Metric)", Temperature Coefficient=X7R, Voltage Rating=50V, Dimensions="0.063\" L x 0.031\" W (1.60mm x 0.80mm)"
C3: library part CAP_0.1uF_50V_0603, "CAP CER 0.1UF 50V X7R 0603", Digikey Part Number=311-1521-1-ND, Manufacturer=Yageo, MPN=CC0603KRX5R5BB475, Package="0603 (1608 Metric)", Temperature Coefficient=X5R, Voltage Rating=6.3V, Dimensions="0.063\" L x 0.031\" W (1.60mm x 0.80mm)"
C4 C5 C6 C7 C8 C13 C16 C21 C22 C23 C24 C25 C26 C30 C31 C32 C33 C34 C35 C36 C37 C38 C39: library part CAP_0.1uF_50V_0603, "CAP CER 0.1UF 50V X7R 0603", Digikey Part Number=311-1088-1-ND, Manufacturer=Yageo, MPN=CC0603KRX7R7BB104, Package="0603 (1608 Metric)", Temperature Coefficient=X7R, Voltage Rating=16V, Dimensions="0.063\" L x 0.031\" W (1.60mm x 0.80mm)"
C9 C10: library part CAP_0.1uF_50V_0603, "CAP CER 0.1UF 50V X7R 0603", Digikey Part Number=311-1372-1-ND, Manufacturer=Yageo, MPN=CC0603ZRY5V7BB105, Package="0603 (1608 Metric)", Temperature Coefficient=Y5V, Voltage Rating=16V, Dimensions="0.063\" L x 0.031\" W (1.60mm x 0.80mm)"
C11: library part CAP_10nF_0603, "CAP CER 10000PF 16V X7R 0603", Digikey Part Number=311-1344-1-ND, Manufacturer=Yageo, MPN=CC0603KRX7R9BB104, Package="0603 (1608 Metric)", Temperature Coefficient=X7R, Voltage Rating=50V, Dimensions="0.063\" L x 0.031\" W (1.60mm x 0.80mm)"
C12: library part CAP_1uF_16V_0603, "CAP CER 1UF 16V Y5V 0603", Digikey Part Number=311-3369-1-ND, Manufacturer=Yageo, MPN=CC0603KRX7R7BB103, Package="0603 (1608 Metric)", Temperature Coefficient=X7R, Voltage Rating=16V, Dimensions="0.063\" L x 0.031\" W (1.60mm x 0.80mm)"
C14 C15: "CAP CER 15PF 250V NPO 0603", Digikey Part Number=311-3282-1-ND, Manufacturer=Yageo, MPN=AC0603JRNPOYBN150, Package="0603 (1608 Metric)", Temperature Coefficient=NP0, Voltage Rating=250V, Dimensions="0.063\" L x 0.031\" W (1.60mm x 0.80mm)"
C17 C18: "CAP CER 4.7UF 6.3V X5R 0603", Digikey Part Number=311-1521-1-ND, Manufacturer=Yageo, MPN=CC0603KRX5R5BB475, Package="0603 (1608 Metric)", Temperature Coefficient=X5R, Voltage Rating=6.3V, Dimensions="0.063\" L x 0.031\" W (1.60mm x 0.80mm)"
C19 C20: "CAP TANT 10UF 20% 10V 1411", Digikey Part Number=478-12047-1-ND, Manufacturer="AVX Corporation", MPN=F971A106MBAHT3, Package="1411 (3528 Metric)", Voltage Rating=10V, Dimensions="0.063\" L x 0.031\" W (1.60mm x 0.80mm)"
C27: "CAP DNP 0603", Package="0603 (1608 Metric)", Dimensions="0.063\" L x 0.031\" W (1.60mm x 0.80mm)"
C28: library part CAP_0.1uF_50V_0603, "CAP CER 0.1UF 50V X7R 0603", Package="0603 (1608 Metric)", Dimensions="0.063\" L x 0.031\" W (1.60mm x 0.80mm)"
C29: library part CAP_DNP_0603, "CAP DNP 0603", Digikey Part Number=311-1088-1-ND, Manufacturer=Yageo, MPN=CC0603KRX7R7BB104, Package="0603 (1608 Metric)", Temperature Coefficient=X7R, Voltage Rating=16V, Dimensions="0.063\" L x 0.031\" W (1.60mm x 0.80mm)"
CAN1 FSR1_1 FSR1_2 FSR1_3 FSR2_1 FSR2_2 FSR2_3: library part "Header 2", "Header, 2-Pin", LatestRevisionDate=17-Jul-2002, LatestRevisionNote="Re-released for DXP Platform.", Publisher="Altium Limited"
CAN2: library part TESTPOINT_LOOP, "Loop testpoint through-hole pad", LatestRevisionDate=17-Jul-2002, LatestRevisionNote="Re-released for DXP Platform.", Publisher="Altium Limited"
CMC1 CMC2: "Common Mode Choke", Supplier Part Number 1=DR331-513AECT-ND, LatestRevisionDate=17-Jul-2002, LatestRevisionNote="Re-released for DXP Platform.", PackageDescription="Transformer; 5 Leads", PackageReference=TRF_5, Published=8-Jun-2000, Publisher="Altium Limited", Supplier 1=Digi-Key
D1: library part SS32, "Diode Schottky 20V 3A Surface Mount SMC (DO-214AB)", Digikey Part Number=1727-3891-1-ND, Manufacturer="Nexperia USA Inc.", MPN=PESD2CAN,215, Package="SC-70, SOT-323", ComponentLink1Description=Datasheet, ComponentLink1URL=https://assets.nexperia.com/documents/data-sheet/PESD1CAN-U.pdf
D2: "TVS DIODE 24V 41V SOT323-3", Digikey Part Number=1727-3891-1-ND, Manufacturer="Nexperia USA Inc.", MPN=PESD2CAN,215, Package="SC-70, SOT-323", ComponentLink1Description=Datasheet, ComponentLink1URL=https://assets.nexperia.com/documents/data-sheet/PESD1CAN-U.pdf
D3 D5: library part TVS_DIODE_CAN, "TVS DIODE 24V 41V SOT323-3", Digikey Part Number=475-1410-1-ND, Forward Voltage Drop=2.2V, Manufacturer=OSRAM, MPN="LG R971-KN-1", Package="0805 (2012 Metric)"
D4: library part TVS_DIODE_CAN, "TVS DIODE 24V 41V SOT323-3", Digikey Part Number=475-2560-1-ND, Forward Voltage Drop=2.2V, Manufacturer=OSRAM, MPN="LY R976-PS-36", Package="0805 (2012 Metric)"
D6: "LED GREEN DIFFUSED 0805 SMD", Digikey Part Number=475-1410-1-ND, Forward Voltage Drop=2.2V, Manufacturer=OSRAM, MPN="LG R971-KN-1", Package="0805 (2012 Metric)"
D7: library part DIO_LED_Y, "LED YELLOW DIFFUSED 0805 SMD", Digikey Part Number=475-1410-1-ND, Forward Voltage Drop=2.2V, Manufacturer=OSRAM, MPN="LG R971-KN-1", Package="0805 (2012 Metric)"
D8: library part DIO_LED_G, "LED GREEN DIFFUSED 0805 SMD", Manufacturer="ON Semiconductor / Fairchild", Supplier Part Number 1=SS32CT-ND, Part number=SS32, Supplier 1=Digi-Key
D9 D10: library part DIO_LED_G, "LED GREEN DIFFUSED 0805 SMD", Digikey Part Number=1727-3891-1-ND, Manufacturer="Nexperia USA Inc.", MPN=PESD2CAN,215, Package="SC-70, SOT-323", ComponentLink1Description=Datasheet, ComponentLink1URL=https://assets.nexperia.com/documents/data-sheet/PESD1CAN-U.pdf
DEBUG1: "Header, 4-Pin Dual row", Digikey Part Number=S9015E-04-ND, Manufacturer="Sullins Connector Solutions", MPN=GRPB042VWVN-RC
F1: "FUSE SMD 2A 32V", Current Rating=2A, Supplier Part Number 1=F7132CT-ND, Voltage Rating (AC)=32V, ComponentLink1Description=https://datasheet.ciiva.com/303/467-303400.pdf?src-supplier=Digi-Key, ComponentLink1URL=https://datasheet.ciiva.com/303/467-303400.pdf?src-supplier=Digi-Key, ComponentLink2Description=http://datasheet.octopart.com/0467002.NRHF-Littelfuse-datasheet-32023482.pdf?src-supplier=Future+Electronics, ComponentLink2URL=http://datasheet.octopart.com/0467002.NRHF-Littelfuse-datasheet-32023482.pdf?src-supplier=Future+Electronics, ComponentLink3Description=http://datasheet.octopart.com/0467002.NRHF-Littelfuse-datasheet-136509808.pdf?src-supplier=Future+Electronics, ComponentLink3URL=http://datasheet.octopart.com/0467002.NRHF-Littelfuse-datasheet-136509808.pdf?src-supplier=Future+Electronics, Mount="Surface Mount", Supplier 1=Digi-Key, Supplier Packaging 1="Cut Tape", Voltage Rating (DC)=32V
F2: "FUSE SMD 1.5A 32V", Current Rating=1.5A, Supplier Part Number 1=F5702CT-ND, Voltage Rating (AC)=32V, ComponentLink1Description=https://datasheet.ciiva.com/26890/getdatasheetpartid-721713-26890390.pdf?src-supplier=Verical, ComponentLink1URL=https://datasheet.ciiva.com/26890/getdatasheetpartid-721713-26890390.pdf?src-supplier=Verical, ComponentLink2Description=https://datasheet.ciiva.com/7464/467-7464069.pdf?src-supplier=Digi-Key, ComponentLink2URL=https://datasheet.ciiva.com/7464/467-7464069.pdf?src-supplier=Digi-Key, ComponentLink3Description=https://datasheet.ciiva.com/7464/467-7464072.pdf?src-supplier=Digi-Key, ComponentLink3URL=https://datasheet.ciiva.com/7464/467-7464072.pdf?src-supplier=Digi-Key, Mount="Surface Mount", Supplier 1=Digi-Key, Supplier Packaging 1="Cut Tape", Voltage Rating (DC)=32V
F3 F4 F5 F6 F7 F8: "FUSE SMD 250mA 32V", Current Rating=250mA, Supplier Part Number 1=F6020CT-ND, Voltage Rating (AC)=32V, ComponentLink1Description=https://datasheet.ciiva.com/303/467-303396.pdf?src-supplier=Digi-Key, ComponentLink1URL=https://datasheet.ciiva.com/303/467-303396.pdf?src-supplier=Digi-Key, ComponentLink2Description=https://datasheet.ciiva.com/18652/littelfuse-fuse-467-datasheet-pdf-18652490.pdf?src-supplier=Digi-Key, ComponentLink2URL=https://datasheet.ciiva.com/18652/littelfuse-fuse-467-datasheet-pdf-18652490.pdf?src-supplier=Digi-Key, ComponentLink3Description=https://datasheet.ciiva.com/18652/littelfuse-fuse-467-datasheet-pdf-18652491.pdf?src-supplier=Digi-Key, ComponentLink3URL=https://datasheet.ciiva.com/18652/littelfuse-fuse-467-datasheet-pdf-18652491.pdf?src-supplier=Digi-Key, ComponentLink4Description=https://datasheet.ciiva.com/18652/littelfuse-fuse-467-datasheet-pdf-18652492.pdf?src-supplier=Digi-Key, ComponentLink4URL=https://datasheet.ciiva.com/18652/littelfuse-fuse-467-datasheet-pdf-18652492.pdf?src-supplier=Digi-Key, Mount="Surface Mount", Supplier 1=Digi-Key, Supplier Packaging 1="Cut Tape", Voltage Rating (DC)=32V
H1 H2 H3 H4: "6cm x 6cm"
Q1: "MOSFET N-CH 20V 6A SOT23", Digikey Part Number=785-1014-1-ND, Manufacturer="Alpha & Omega", MPN=AO3420, Package="TO-236-3, SC-59, SOT-23-3", ComponentLink1Description=Datasheet, ComponentLink1URL=http://aosmd.com/res/data_sheets/AO3420.pdf
R1 R5: "RES SMD 120 OHM 5% 1/10W 0603", Digikey Part Number=311-120GRCT-ND, Manufacturer=Yageo, MPN=RC0603JR-07120RL, Package="0603 (1608 Metric)", Tolerance=5%, Dimensions="0.063\" L x 0.031\" W (1.60mm x 0.80mm)"
R2 R3 R4 R6 R7 R8 R25: "RES SMD 0 OHM JUMPER 1/10W 0603", Digikey Part Number=311-0.0GRCT-ND, Manufacturer=Yageo, MPN=RC0603JR-070RL, Package="0603 (1608 Metric)", Dimensions="0.063\" L x 0.031\" W (1.60mm x 0.80mm)"
R9: library part RES_10K_0603, "RES SMD 10K OHM 5% 1/10W 0603", Digikey Part Number=311-825KHRCT-ND, Manufacturer=Yageo, MPN=RC0603FR-07825KL, Package="0603 (1608 Metric)", Tolerance=1%, Dimensions="0.063\" L x 0.031\" W (1.60mm x 0.80mm)"
R10 R11 R12 R13 R14 R16 R17 R18 R19 R20 R21 R22 R23 R24 R31 R64: "RES SMD 10K OHM 5% 1/10W 0603", Digikey Part Number=311-10KGRCT-ND, Manufacturer=Yageo, MPN=RC0603JR-0710KL, Package="0603 (1608 Metric)", Tolerance=5%, Dimensions="0.063\" L x 0.031\" W (1.60mm x 0.80mm)"
R26 R30 R32: "RES SMD 100 OHM 1% 1/10W 0603", Digikey Part Number=311-100HRCT-ND, Manufacturer=Yageo, MPN=RC0603FR-07100RL, Package="0603 (1608 Metric)", Tolerance=1%, Dimensions="0.063\" L x 0.031\" W (1.60mm x 0.80mm)"
R27 R28: library part RES_100R_0603, "RES SMD 100 OHM 1% 1/10W 0603", Digikey Part Number=311-3.3KGRCT-ND, Manufacturer=Yageo, MPN=RC0603JR-073K3L, Package="0603 (1608 Metric)", Tolerance=5%, Dimensions="0.063\" L x 0.031\" W (1.60mm x 0.80mm)", Supplier 1=Digi-Key
R29: library part RES_10K_0603, "RES SMD 10K OHM 5% 1/10W 0603", Digikey Part Number=311-100HRCT-ND, Manufacturer=Yageo, MPN=RC0603FR-07100RL, Package="0603 (1608 Metric)", Tolerance=1%, Dimensions="0.063\" L x 0.031\" W (1.60mm x 0.80mm)"
R33: library part RES_1K_0603, "RES SMD 1K OHM 5% 1/10W 0603", Digikey Part Number=311-100HRCT-ND, Manufacturer=Yageo, MPN=RC0603FR-07100RL, Package="0603 (1608 Metric)", Tolerance=1%, Dimensions="0.063\" L x 0.031\" W (1.60mm x 0.80mm)"
R34: library part RES_1K_0603, "RES SMD 1K OHM 5% 1/10W 0603", Digikey Part Number=311-10KGRCT-ND, Manufacturer=Yageo, MPN=RC0603JR-0710KL, Package="0603 (1608 Metric)", Tolerance=5%, Dimensions="0.063\" L x 0.031\" W (1.60mm x 0.80mm)"
R35: "RES SMD 1K OHM 5% 1/10W 0603", Digikey Part Number=311-1.0KGRCT-ND, Manufacturer=Yageo, MPN=RC0603JR-071KL, Package="0603 (1608 Metric)", Tolerance=5%, Dimensions="0.063\" L x 0.031\" W (1.60mm x 0.80mm)"
R36: library part RES_825K_0603, "RES SMD 825K OHM 1% 1/10W 0603", Digikey Part Number=311-1.0KGRCT-ND, Manufacturer=Yageo, MPN=RC0603JR-071KL, Package="0603 (1608 Metric)", Tolerance=5%, Dimensions="0.063\" L x 0.031\" W (1.60mm x 0.80mm)"
R37: library part RES_1K1_0603, "RES SMD 1.1K OHM 1% 1/10W 0603", Digikey Part Number=311-1.0KGRCT-ND, Manufacturer=Yageo, MPN=RC0603JR-071KL, Package="0603 (1608 Metric)", Tolerance=5%, Dimensions="0.063\" L x 0.031\" W (1.60mm x 0.80mm)"
R38 R40: library part RES_165K_0603, "RES SMD 165K OHM 1% 1/10W 0603", Package="0603 (1608 Metric)", Dimensions="0.063\" L x 0.031\" W (1.60mm x 0.80mm)"
R39: library part RES_DNP_0603, "RES DNP 0603", Digikey Part Number=311-1.10KHRCT-ND, Manufacturer=Yageo, MPN=RC0603FR-071K1L, Package="0603 (1608 Metric)", Tolerance=1%, Dimensions="0.063\" L x 0.031\" W (1.60mm x 0.80mm)"
R41: library part RES_2K2_0603, "RES SMD 2.2K OHM 1% 1/10W 0603", Digikey Part Number=311-165KHRCT-ND, Manufacturer=Yageo, MPN=RC0603FR-07165KL, Package="0603 (1608 Metric)", Tolerance=1%, Dimensions="0.063\" L x 0.031\" W (1.60mm x 0.80mm)"
R42: library part RES_14K3_0603, "RES SMD 14.3K OHM 1% 1/10W 0603", Digikey Part Number=311-165KHRCT-ND, Manufacturer=Yageo, MPN=RC0603FR-07165KL, Package="0603 (1608 Metric)", Tolerance=1%, Dimensions="0.063\" L x 0.031\" W (1.60mm x 0.80mm)"
R43: library part RES_825K_0603, "RES SMD 825K OHM 1% 1/10W 0603", Digikey Part Number=311-2.20KHRCT-ND, Manufacturer=Yageo, MPN=RC0603FR-072K2L, Package="0603 (1608 Metric)", Tolerance=1%, Dimensions="0.063\" L x 0.031\" W (1.60mm x 0.80mm)"
R44: library part RES_DNP_0603, "RES DNP 0603", Digikey Part Number=311-14.3KHRCT-ND, Manufacturer=Yageo, MPN=RC0603FR-0714K3L, Package="0603 (1608 Metric)", Tolerance=1%, Dimensions="0.063\" L x 0.031\" W (1.60mm x 0.80mm)"
R45: library part RES_1K_0603, "RES SMD 1K OHM 5% 1/10W 0603", Digikey Part Number=311-825KHRCT-ND, Manufacturer=Yageo, MPN=RC0603FR-07825KL, Package="0603 (1608 Metric)", Tolerance=1%, Dimensions="0.063\" L x 0.031\" W (1.60mm x 0.80mm)"
R46: library part RES_3K3_0603, "RES SMD 3.3K OHM 5% 1/10W 0603", Digikey Part Number=311-1.0KGRCT-ND, Manufacturer=Yageo, MPN=RC0603JR-071KL, Package="0603 (1608 Metric)", Tolerance=5%, Dimensions="0.063\" L x 0.031\" W (1.60mm x 0.80mm)"
R47 R52 R53 R58 R59: "RES SMD 3.3K OHM 5% 1/10W 0603", Digikey Part Number=311-3.3KGRCT-ND, Manufacturer=Yageo, MPN=RC0603JR-073K3L, Package="0603 (1608 Metric)", Tolerance=5%, Dimensions="0.063\" L x 0.031\" W (1.60mm x 0.80mm)", Supplier 1=Digi-Key
R48 R54 R60: library part RES_3K3_0603, "RES SMD 3.3K OHM 5% 1/10W 0603", Digikey Part Number=311-2.20KHRCT-ND, Manufacturer=Yageo, MPN=RC0603FR-072K2L, Package="0603 (1608 Metric)", Tolerance=1%, Dimensions="0.063\" L x 0.031\" W (1.60mm x 0.80mm)"
R49 R50 R55 R56 R61 R62: "RES SMD 2.2K OHM 1% 1/10W 0603", Digikey Part Number=311-2.20KHRCT-ND, Manufacturer=Yageo, MPN=RC0603FR-072K2L, Package="0603 (1608 Metric)", Tolerance=1%, Dimensions="0.063\" L x 0.031\" W (1.60mm x 0.80mm)"
R51 R57: library part RES_2K2_0603, "RES SMD 2.2K OHM 1% 1/10W 0603", Digikey Part Number=311-3.3KGRCT-ND, Manufacturer=Yageo, MPN=RC0603JR-073K3L, Package="0603 (1608 Metric)", Tolerance=5%, Dimensions="0.063\" L x 0.031\" W (1.60mm x 0.80mm)", Supplier 1=Digi-Key
R63: library part RES_2K2_0603, "RES SMD 2.2K OHM 1% 1/10W 0603", Digikey Part Number=311-10KGRCT-ND, Manufacturer=Yageo, MPN=RC0603JR-0710KL, Package="0603 (1608 Metric)", Tolerance=5%, Dimensions="0.063\" L x 0.031\" W (1.60mm x 0.80mm)"
S1: "Power Switch (Red)", Digikey Part Number=CKN10587CT-ND, Manufacturer=C&K, MPN="PTS830GM140 SMTR LFS", ComponentLink1Description=Datasheet, ComponentLink1URL=https://www.ckswitches.com/media/1478/pts830.pdf
S2 S3: "Tactile Switch (Grey)", Digikey Part Number=SW1021TR-ND, Manufacturer="Omron Electronics Inc-EMC Div", MPN=B3U-1100P
U1 U2: library part LTC2875, "IC TXRX CAN 4MBPS 8SO", Digikey Part Number=LTC2875IS8#PBF-ND, Manufacturer="Linear Technologies", MPN=LTC2875IS8#PBF, Package="8-SOIC (0.154\", 3.90mm Width)", ComponentLink1Description=Datasheet, ComponentLink1URL=https://www.analog.com/media/en/technical-documentation/data-sheets/2875f.pdf
U3: library part CMP-0243-00221-1, "ARM Cortex-M4 32-bit MCU+FPU, 512 KB Flash, 128 KB Internal RAM, 81 I/Os, 100-Pin LQFP, -40 to 105 degC, Tray", Digi-Key Part Number=296-35607-1-ND, Manufacturer="Texas Instruments", Rating=Catalog, Total Supply Voltage(Max)(+5V is 5, +/-5V is 10)=5.5, Total Supply Voltage(Min)(+5V is 5, +/-5V is 10)=1.8, CMRR(Min)(dB)=70, Code_JEDEC=MO-178, ComponentLink1Description="Manufacturer URL", ComponentLink1URL=http://www.ti.com/, ComponentLink2Description=Datasheet, ComponentLink2URL=http://www.ti.com/lit/ds/symlink/opa313.pdf, ComponentLink3Description="Package Specification", ComponentLink3URL=http://www.ti.com/litv/pdf/mpds018i, DatasheetVersion=SBOS649C, Eco-Plan="Green (RoHS & no Sb/Br)", GBW(Typ)(MHz)=1, Iq per channel(Max)(mA)=0.06, Mounting Technology="Surface Mount", Number of Channels=1, Offset Drift(Typ)(uV/C)=2, PackageDescription="5-Pin Plastic Small Outline, Body 1.6 x 2.9 mm, Pitch 0.95 mm", PackageReference=DBV0005A, PackageVersion="4073253-4/K, 03/2006", Packing="LARGE T&R", PartNumber=OPA313IDBVR, Slew Rate(Typ)(V/us)=0.5, SubFamily="Low Input Bias Current Amp (<=10pA), Low Power Amp (<=500uA)", Vio (25C)(Max)(mV)=2.5
U4: library part CMP-0859-00013-4, "Dual-Bit Dual Supply Transceiver with Configurable Voltage Translation and 3-State Outputs, DCU0008A, LARGE T&R", I/Os (High Current)=81, Operating Frequency(F) (Processor speed) (MHz)=180, Package Description=LQFP100, Package Reference="100-Pin Low Profile Quad Flat Package, Body 14 x 14 mm, Pitch 0.5 mm", Supply Voltage(Vcc) min (V)=1.7, ComponentLink1Description="Manufacturer URL", ComponentLink1URL=http://www.st.com/, ComponentLink2Description=Datasheet, ComponentLink2URL=http://www.st.com/st-web-ui/static/active/en/resource/technical/document/datasheet/DM00141306.pdf, Core="ARM Cortex-M4", D/A Converter=2, DatasheetVersion="Rev. 6", FLASH Size (Prog) (kB)=512, Internal RAM Size (kB)=128, Mounting Technology="Surface Mount", Packing=Tray
U5 U6: library part CMP-0859-00013-4, "Dual-Bit Dual Supply Transceiver with Configurable Voltage Translation and 3-State Outputs, DCU0008A, LARGE T&R", F @ Nom Voltage(Max)(Mhz)=150, Generic Part Number=SN74LVC2T45, ICC @ Nom Voltage(Max)(mA)=0.004, Manufacturer="Texas Instruments", Operating Temperature Range(C)="-40 to 85", Rating=Military, tpd @ Nom Voltage(Max)(ns)=17.7,10.3,8.3,7.2, Voltage(Nom)(V)=1.8,2.5,3.3,5, 3-State Output=Yes, Bits(#)=2, DatasheetVersion=SCES516J, Input Type=CMOS/TTL, Logic=True, Output Drive (IOL/IOH)(Max)(mA)=32/-32, Output Type=CMOS, PackageReference=DCU0008A, Schmitt Trigger=No, Sub-Family="Dual Supply Translator", Technology Family=LVC, VCC(Max)(V)=5.5, VCC(Min)(V)=1.65
U7: library part OPAMP, "IC OPAMP GP 1 CIRCUIT SOT23-5", F @ Nom Voltage(Max)(Mhz)=150, Generic Part Number=SN74LVC2T45, ICC @ Nom Voltage(Max)(mA)=0.004, Manufacturer="Texas Instruments", Operating Temperature Range(C)="-40 to 85", Rating=Military, tpd @ Nom Voltage(Max)(ns)=17.7,10.3,8.3,7.2, Voltage(Nom)(V)=1.8,2.5,3.3,5, 3-State Output=Yes, Bits(#)=2, DatasheetVersion=SCES516J, Input Type=CMOS/TTL, Logic=True, Output Drive (IOL/IOH)(Max)(mA)=32/-32, Output Type=CMOS, PackageReference=DCU0008A, Schmitt Trigger=No, Sub-Family="Dual Supply Translator", Technology Family=LVC, VCC(Max)(V)=5.5, VCC(Min)(V)=1.65
U8: "IC OPAMP GP 1 CIRCUIT 8SOIC", Digikey Part Number=CA3140AMZ-ND, Manufacturer="Renesas Electronics America Inc.", MPN=CA3140AMZ
VR1: "IC REG LINEAR 3.3V 1A DPAK", Current Output=1A, Digikey Part Number=NCP1117DT33T5GOSCT-ND, Manufacturer="ON Semiconductor", MPN=NCP1117DT33T5G
Y1: "CRYSTAL 32MHZ 8PF SMD", Digikey Part Number=1253-1730-1-ND, Manufacturer="Kyocera International Inc. Electronic Components", MPN=CX2520DB32000D0GPSC1, Package="4-SMD, No Lead", ComponentLink1Description=Datasheet, ComponentLink1URL=https://media.digikey.com/pdf/Data%20Sheets/AVX%20PDFs/CX2520DB_USY1M-H1-16428-00_Spec.pdf, Dimensions="0.098\" L x 0.079\" W (2.50mm x 2.00mm)"

## Nets (pads, with @x,y where several pads share a name; then routed paths per layer and width w, separated by ;. In a path a pad name is that pad's centre, name@x,y a point inside that pad or via, vN(x,y) a via of type N, cw(c..) or ccw(c..) an arc to the next point about the centre after c; other vN are vias at no path point)
3V3: C21.2 C23.2 C25.2 R35.1 R36.1 R37.1 SPI_1.5 SPI_2.5 SPI_4.5 U5.1 U6.1 U7.1
5V: C22.2 C24.2 C26.2 C29.2 C30.2 U5.8 U6.8 U7.8
+3V3: 3V3.1 C1.2 C2.2 C3.2 C4.2 C5.2 C6.2 C7.2 C8.2 C9.2 C10.2 C11.2 C12.2 C13.2 C20.1 DEBUG1.1 Q1.1 R17.2 R18.2 R19.2 R20.2 R21.2 R22.2 R23.2 R24.2 R26.2 R31.1 R34.2 R64.2 U1.3 U2.3 U4.6 U4.11 U4.19 U4.21 U4.22 U4.28 U4.50 U4.75 U4.100 VR1.2
+5V0: 5V.1 C19.1 F1.2 F2.2 F3.2 F4.2 F5.2 F6.2 F7.2 F8.2 FSR1_1.2 FSR2_1.2 R39.2 R63.2 U3.5 U8.7 VR1.3
CAN1_N: CAN1.1 CAN1A.1 CAN1B.1 CAN1H.1 CMC1.4 D1.2 D9.2 R2.2
CAN1_P: CAN1A.2 CAN1B.2 CAN1L.1 CMC1.3 D1.1 D9.1 R1.1 R4.2
CAN2_N: CAN2.1 CAN2A.1 CAN2B.1 CAN2H.1 CMC2.4 D2.2 D10.2 R6.2
CAN2_P: CAN2A.2 CAN2B.2 CAN2L.1 CMC2.3 D2.1 D10.1 R5.1 R8.2
GND: +5V.2 C1.1 C2.1 C3.1 C4.1 C5.1 C6.1 C7.1 C8.1 C9.1 C10.1 C11.1 C12.1 C13.1 C14.1 C15.1 C16.1 C17.1 C18.1 C19.2 C20.2 C21.1 C22.1 C23.1 C24.1 C25.1 C26.1 C27.1 C28.1 C29.1 C30.1 C31.1 C32.1 C33.1 C34.1 C35.1 C36.1 C37.1 C38.1 C39.1 CAN1A.3 CAN1B.3 CAN2A.3 CAN2B.3 D1.3 D2.3 D3.2 D4.2 D5.2 D6.2 D7.2 D9.3 D10.3 DEBUG1.5 EN_BCP.3 EN_CAW.4 EN_ELB.3 EN_TRN.3 EN_WST1.4 EN_WST2.4 GND.1 LIM_CAW.2 LIM_ELB1.2 LIM_ELB2.2 LIM_TRN1.2 LIM_TRN2.2 LIM_WST1.2 LIM_WST2.2 LIM_WST3.2 M_CB.5 M_ELB.1 M_TRN.1 M_WST.5 R3.2 R7.2 R10.1 R11.1 R12.1 R13.1 R14.1 R16.1 R43.1 R44.1 R45.1 R46.1 R48.1 R49.1 R50.1 R54.1 R55.1 R56.1 R60.1 R61.1 R62.1 S1.1 S2.2 S3.2 SPI_1.1 SPI_2.1 SPI_4.1 SV_CAW1.3 U1.2 U2.2 U3.2 U4.10 U4.20 U4.27 U4.37 U4.49 U4.74 U4.94 U4.99 U5.4 U6.4 U7.4 U8.4 VR1.1 Y1.2
Net+5V_1: +5V.1 D8.2
NetC14_2: C14.2 R25.2 Y1.1
NetC15_2: C15.2 U4.13 Y1.3
NetC16_2: C16.2 DEBUG1.8 S1.4 U4.14
NetC17_2: C17.2 U4.73
NetC18_2: C18.2 U4.48
NetC27_2: C27.2 C28.2 R38.2 R40.2 U4.16
NetC31_2: C31.2 R27.1 R48.2 U4.40
NetC32_2: C32.2 R28.1 R49.2 U4.63
NetC33_2: C33.2 R47.1 U4.42
NetC34_2: C34.2 R51.1 R54.2 U4.23
NetC35_2: C35.2 R52.1 R55.2 U4.4
NetC36_2: C36.2 R53.1 U4.24
NetC37_2: C37.2 R57.1 R60.2 U4.90
NetC38_2: C38.2 R58.1 R61.2 U4.53
NetC39_2: C39.2 R59.1 U4.64
NetCAN1_2: CAN1.2 R1.2
NetCAN2_2: CAN2.2 R5.2
NetCMC1_1: CMC1.1 R2.1 U1.7
NetCMC1_2: CMC1.2 R4.1 U1.6
NetCMC2_1: CMC2.1 R6.1 U2.7
NetCMC2_2: CMC2.2 R8.1 U2.6
NetD3_1: D3.1 R26.1
NetD4_1: D4.1 R29.2
NetD5_1: D5.1 R30.2
NetD6_1: D6.1 R32.2
NetD7_1: D7.1 R33.2
NetD8_1: D8.1 F1.1
NetDEBUG1_2: DEBUG1.2 U4.39 UART_TX1.1
NetDEBUG1_3: DEBUG1.3 U4.38 UART_RX1.1
NetDEBUG1_4: DEBUG1.4 U4.65 UART_RTS1.1
NetDEBUG1_6: DEBUG1.6 U4.72
NetDEBUG1_7: DEBUG1.7 U4.76
NetEN_BCP_1: EN_BCP.1 F4.1
NetEN_BCP_2: EN_BCP.2 R28.2
NetEN_CAW_1: EN_CAW.1 R27.2
NetEN_CAW_2: EN_CAW.2 R47.2
NetEN_CAW_3: EN_CAW.3 F3.1
NetEN_ELB_1: EN_ELB.1 F6.1
NetEN_ELB_2: EN_ELB.2 R52.2
NetEN_TRN_1: EN_TRN.1 F8.1
NetEN_TRN_2: EN_TRN.2 R58.2
NetEN_WST1_1: EN_WST1.1 R51.2
NetEN_WST1_2: EN_WST1.2 R53.2
NetEN_WST1_3: EN_WST1.3 F5.1
NetEN_WST2_1: EN_WST2.1 R57.2
NetEN_WST2_2: EN_WST2.2 R59.2
NetEN_WST2_3: EN_WST2.3 F7.1
NetF2_1: F2.1 SV_CAW1.2
NetFSR1_1_1: FSR1_1.1 FSR2_1.1 FSR.1
NetFSR1_2_1: FSR1_2.1 FSR2_2.1 FSR.2
NetFSR1_2_2: FSR1_2.2 R41.1 R43.2
NetFSR1_3_1: FSR1_3.1 R9.2 U3.1
NetFSR1_3_2: FSR1_3.2 R38.1
NetFSR2_2_2: FSR2_2.2 R46.2 U8.3
NetFSR2_3_1: FSR2_3.1 U8.6
NetFSR2_3_2: FSR2_3.2 R40.1
NetLIM_CAW_1: LIM_CAW.1 R24.1 U4.80
NetLIM_ELB1_1: LIM_ELB1.1 R17.1 U4.81
NetLIM_ELB2_1: LIM_ELB2.1 R18.1 U4.88
NetLIM_TRN1_1: LIM_TRN1.1 R19.1 U4.83
NetLIM_TRN2_1: LIM_TRN2.1 R20.1 U4.84
NetLIM_WST1_1: LIM_WST1.1 R21.1 U4.85
NetLIM_WST2_1: LIM_WST2.1 R22.1 U4.86
NetLIM_WST3_1: LIM_WST3.1 R23.1 U4.87
NetM_CB_1: M_CB.1 U4.55
NetM_CB_2: M_CB.2 R12.2 U4.59
NetM_CB_3: M_CB.3 U4.56
NetM_CB_4: M_CB.4 R13.2 U4.60
NetM_ELB_2: M_ELB.2 R16.2 U4.62
NetM_ELB_3: M_ELB.3 U4.58
NetM_TRN_2: M_TRN.2 R11.2 U4.61
NetM_TRN_3: M_TRN.3 U4.57
NetM_WST_1: M_WST.1 U4.97
NetM_WST_2: M_WST.2 R10.2 U4.95
NetM_WST_3: M_WST.3 U4.98
NetM_WST_4: M_WST.4 R14.2 U4.96
NetQ1_2: Q1.2 R64.1 U4.32
NetR3_1: R3.1 U1.8
NetR7_1: R7.1 U2.8
NetR9_1: R9.1 R41.2 U3.4
NetR25_1: R25.1 U4.12
NetR29_1: R29.1 U4.8
NetR30_1: R30.1 U4.9
NetR31_2: R31.2 S2.1 U4.2
NetR32_1: R32.1 U4.34
NetR33_1: R33.1 U4.46
NetR34_1: R34.1 S3.1 U4.7
NetR35_2: R35.2 U5.5
NetR36_2: R36.2 U6.5
NetR37_2: R37.2 U7.5
NetR39_1: R39.1 R42.1 R44.2
NetR42_2: R42.2 R45.2 U3.3
NetSPI1_MISO_1: SPI1_MISO.1 SPI_2.2 U4.31
NetSPI1_MOSI_1: SPI1_MOSI.1 U4.91 U6.7
NetSPI1_SCK_1: SPI1_SCK.1 U4.89 U6.6
NetSPI2_MISO_1: SPI2_MISO.1 SPI_1.2 U4.17
NetSPI2_MOSI_1: SPI2_MOSI.1 U4.18 U5.7
NetSPI2_SCK_1: SPI2_SCK.1 U4.47 U5.6
NetSPI4_MISO_1: SPI4_MISO.1 SPI_4.2 U4.44
NetSPI4_MOSI_1: SPI4_MOSI.1 U4.5 U7.7
NetSPI4_SCK_1: SPI4_SCK.1 U4.1 U7.6
NetSPI_1_3: SPI_1.3 U5.3
NetSPI_1_4: SPI_1.4 U5.2
NetSPI_2_3: SPI_2.3 U6.3
NetSPI_2_4: SPI_2.4 U6.2
NetSPI_4_3: SPI_4.3 U7.3
NetSPI_4_4: SPI_4.4 U7.2
NetU1_1: U1.1 U4.71
NetU1_4: U1.4 U4.70
NetU2_1: U2.1 U4.52
NetU2_4: U2.4 U4.51
PWM_CSV_5V: Q1.3 R63.1 SV_CAW1.1
pads on no net: CAN1A.4 CAN1A.5 CAN1B.4 CAN1B.5 CAN2A.4 CAN2A.5 CAN2B.4 CAN2B.5 EN_BCP.4 EN_BCP.5 EN_ELB.4 EN_ELB.5 EN_TRN.4 EN_TRN.5 H1.0 H2.0 H3.0 H4.0 M_ELB.4 M_ELB.5 M_TRN.4 M_TRN.5 R50.2 R56.2 R62.2 S1.2 S1.3 SV_CAW1.4 SV_CAW1.5 U1.5 U2.5 U4.3 U4.15 U4.25 U4.26 U4.29 U4.30 U4.33 U4.35 U4.36 U4.41 U4.43 U4.45 U4.54 U4.66 U4.67 U4.68 U4.69 U4.77 U4.78 U4.79 U4.82 U4.92 U4.93 U8.1 U8.2 U8.5 U8.8 Y1.4

## Polygon pours and split planes (outlines as drawn)
no net on Ground (split plane): 2849.9,20.1 20.1,20.1 20.1,2589.9 2849.9,2589.9
no net on Power (split plane): 2849.9,20.1 20.1,20.1 20.1,2589.9 2849.9,2589.9

## Silkscreen, mask and mechanical layers (free items; w line width, h text height)
Mechanical 1:
  circle w0.5: c270,110 r59.06
  circle w0.5: c270,2472.2 r59.06
  circle w0.5: c2632.2,2472.2 r59.06
  circle w0.5: c2632.2,110 r59.06
  lines w0.5: 0,0 2870,0 2870,2610 0,2610 0,0

## Text inside footprints (layer, text, board x,y; h text height)
D8: Top Overlay "A" at 14366.55,1131.91 h60 r90
DEBUG1: Top Overlay "GND" at 15266.31,1080.54 h30 r90; Top Overlay "VCC" at 15262.37,749.83 h30 r90; Top Overlay "RST" at 15566.31,1080.54 h30 r90; Top Overlay "CLK" at 15467.1,1076.6 h30 r90; Top Overlay "IO" at 15364.74,1080.54 h30 r90; Top Overlay "RTS" at 15573.4,752.78 h30 r90; Top Overlay "RX" at 15467.1,781.4 h30 r90; Top Overlay "TX" at 15364.74,781.4 h30 r90